# EAGLE board ADXL326 (EAGLE 5.12)
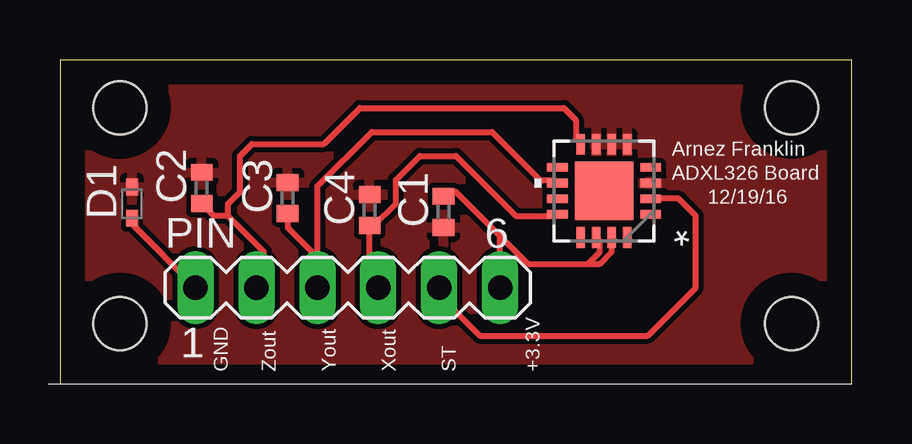
[diagram p0: board, top side]

Size 33 x 13.5 mm. Coordinates in mm from the lower left corner, seen from the top.
Outline: 33,0 33,13.5 0,13.5 0,0
Copper layers (1*16): Top 0.035mm / dielectric 1.5mm / Bottom 0.035mm
Design rules "default": minimum track width 10mil, minimum drill 0.6mm, track to track 8mil, track to pad 8mil, pad to pad 8mil, via to via 8mil, smd to smd 8mil, copper to edge 40mil, drill to drill 8mil, minimum pad ring 10mil, minimum via ring 8mil, stop-mask expansion 4mil, vias tented up to drill 0mil, thermal gap 10mil
Holes 2.2 mm at 2.5,11.5 2.5,2.5 30.5,11.5 30.5,2.5

## Footprints (pad centres in the part's own frame; a part is rotated, then mirrored left to right if it is on the bottom)
C0402 = smd 0.7 x 0.9: 1 -0.65,0; 2 0.65,0
SOD523 = smd 0.7 x 0.5: A 0.7,0; C -0.6,0
MA06-1 = drill 1.016 long: 1 -6.35,0; 2 -3.81,0; 3 -1.27,0; 4 1.27,0; 5 3.81,0; 6 6.35,0
CP_16_5A = smd 0.864 x 0.356: 1 -1.943,0.975; 2 -1.943,0.325; 3 -1.943,-0.325; 4 -1.943,-0.975; 9 1.943,-0.975; 10 1.943,-0.325; 11 1.943,0.325; 12 1.943,0.975 | smd 0.356 x 0.864: 5 -0.975,-1.943; 6 -0.325,-1.943; 7 0.325,-1.943; 8 0.975,-1.943; 13 0.975,1.943; 14 0.325,1.943; 15 -0.325,1.943; 16 -0.975,1.943 | smd 2.438 x 2.438: 17 0,0

## Placement (x,y rotation side)
C1  .1uF  [C0402]  15.99,7.16 90 top
C2  .1uF  [C0402]  5.91,8.16 90 top
C3  .1uF  [C0402]  9.49,7.74 90 top
C4  .1uF  [C0402]  12.91,7.24 90 top
D1  .  [SOD523]  3,7.5 90 top
PIN  [MA06-1]  12,4 0 top
U1  ADXL326BCPZ  [CP_16_5A]  22.68,8.04 180 top

## Library data of the parts
C1-C4 = rcl
D1 = diode
PIN = con-lstb; OC_FARNELL: unknown; OC_NEWARK: unknown
U1 = ADXL326; MANUFACTURER_PART_NUMBER: ADXL320JCP; VENDOR: Vendor

## Nets
COM: C1.1 C2.2 C3.2 C4.2 D1.A U1.3 U1.5 U1.6 U1.7
GND: D1.C PIN.1
ST: PIN.5 U1.2
VS: C1.2 PIN.6 U1.14 U1.15
XOUT: C4.1 PIN.4 U1.12
YOUT: C3.1 PIN.3 U1.10
ZOUT: C2.1 PIN.2 U1.8

## Tracks (layer width: path | path; a pad name or v marks a point on that pad's centre or on a via)
COM
  pour Top: 1,13 32.5,13 32.5,1 1,1
GND
  Top 0.254: D1.C 3,6.65 PIN.1
ST
  Top 0.254: PIN.5 15.81,3.69 17.5,2 24.5,2 26.5,4 26.5,7 25.79,7.71 U1.2
VS
  Top 0.254: PIN.6 18.35,6.15 | 18.35,6.15 16.5,8 16.18,8 C1.2 | 18.35,6.15 19.5,5 22,5 | 22,5 22.5,5.5 22.5,5.95 U1.14 | U1.15 23,5.5 22.5,5 22,5
XOUT
  Top 0.254: PIN.4 12.91,4.36 C4.1 13.09,6.59 14,7.5 14,8.5 15,9.5 16.5,9.5 19,7 20.67,7 U1.12
YOUT
  Top 0.254: PIN.3 10.73,5.27 | 10.73,5.27 9.5,6.5 C3.1 | U1.10 20.6,8.5 20,8.5 18,10.5 13,10.5 10.73,8.23 10.73,5.27
ZOUT
  Top 0.254: U1.8 21.5,10.19 21.5,11 21,11.5 12.5,11.5 11,10 8,10 7.5,9.5 7.5,8 7,7.5 7,7 | PIN.2 8.5,4.31 8.5,5.5 7,7 | 7,7 6.42,7 C2.1

## Text on the board
tNames: Arnez Franklin | ADXL326 Board | 12/19/16 | GND | Zout | Yout | Xout | ST | +3.3V